# Altium PCB PCB1.PcbDoc
Units mm, origin at the board's own origin, x right, y up, seen from the top; angles counter-clockwise.
Board outline 15.62 x 20.45 mm, 2 copper layers (Top Layer, Bottom Layer); 13 components, 10 nets, 47 pads, 11 vias.
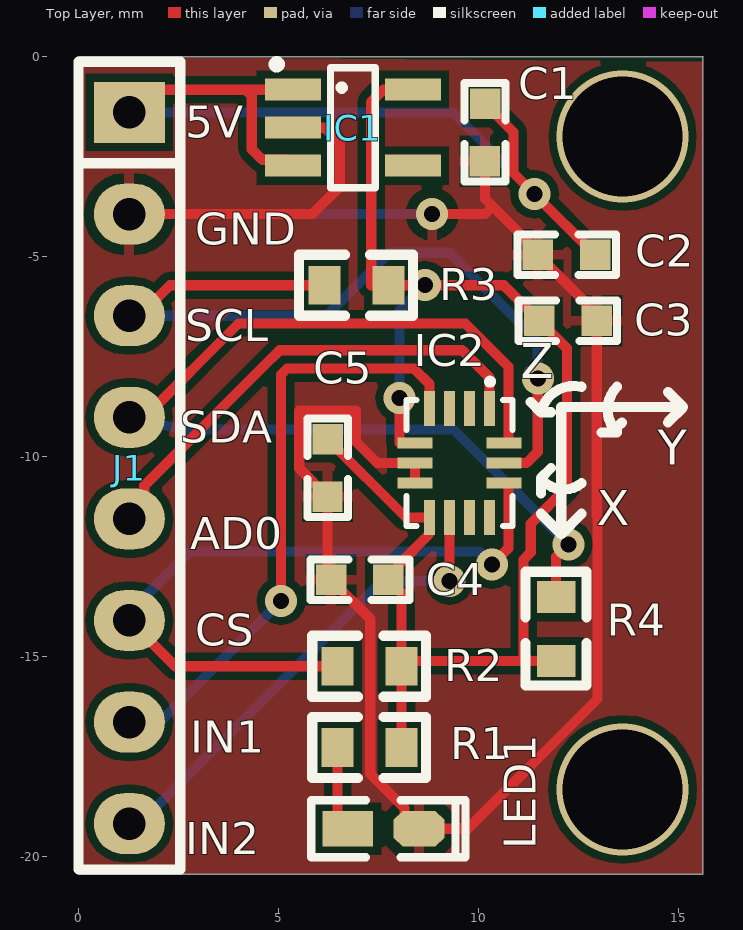
[diagram p0: Top Layer view]
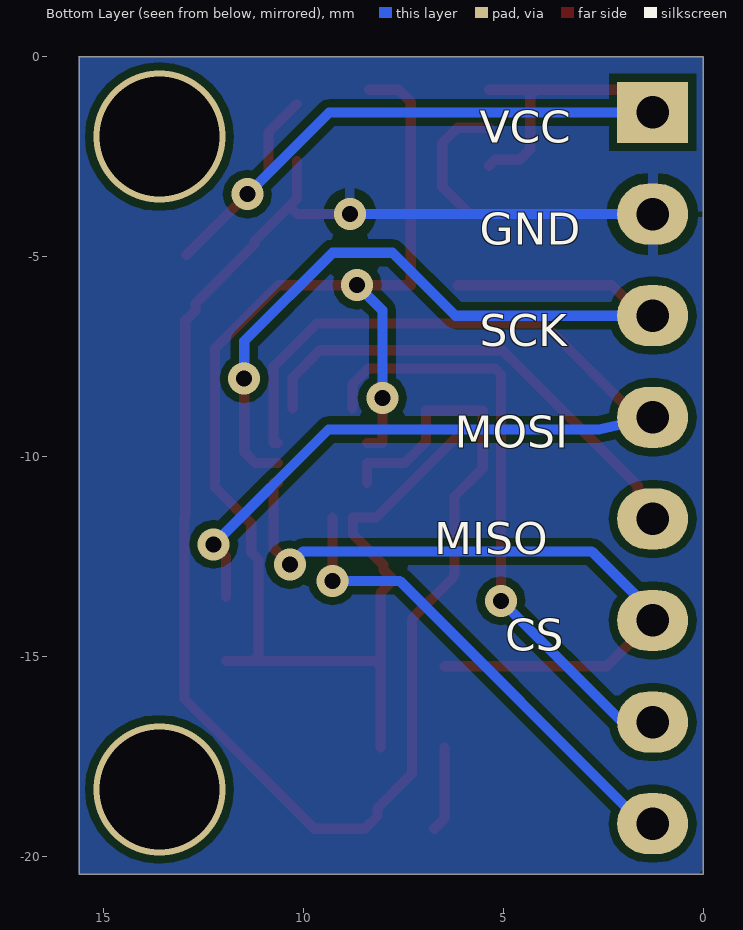
[diagram p1: Bottom Layer view, seen from below]
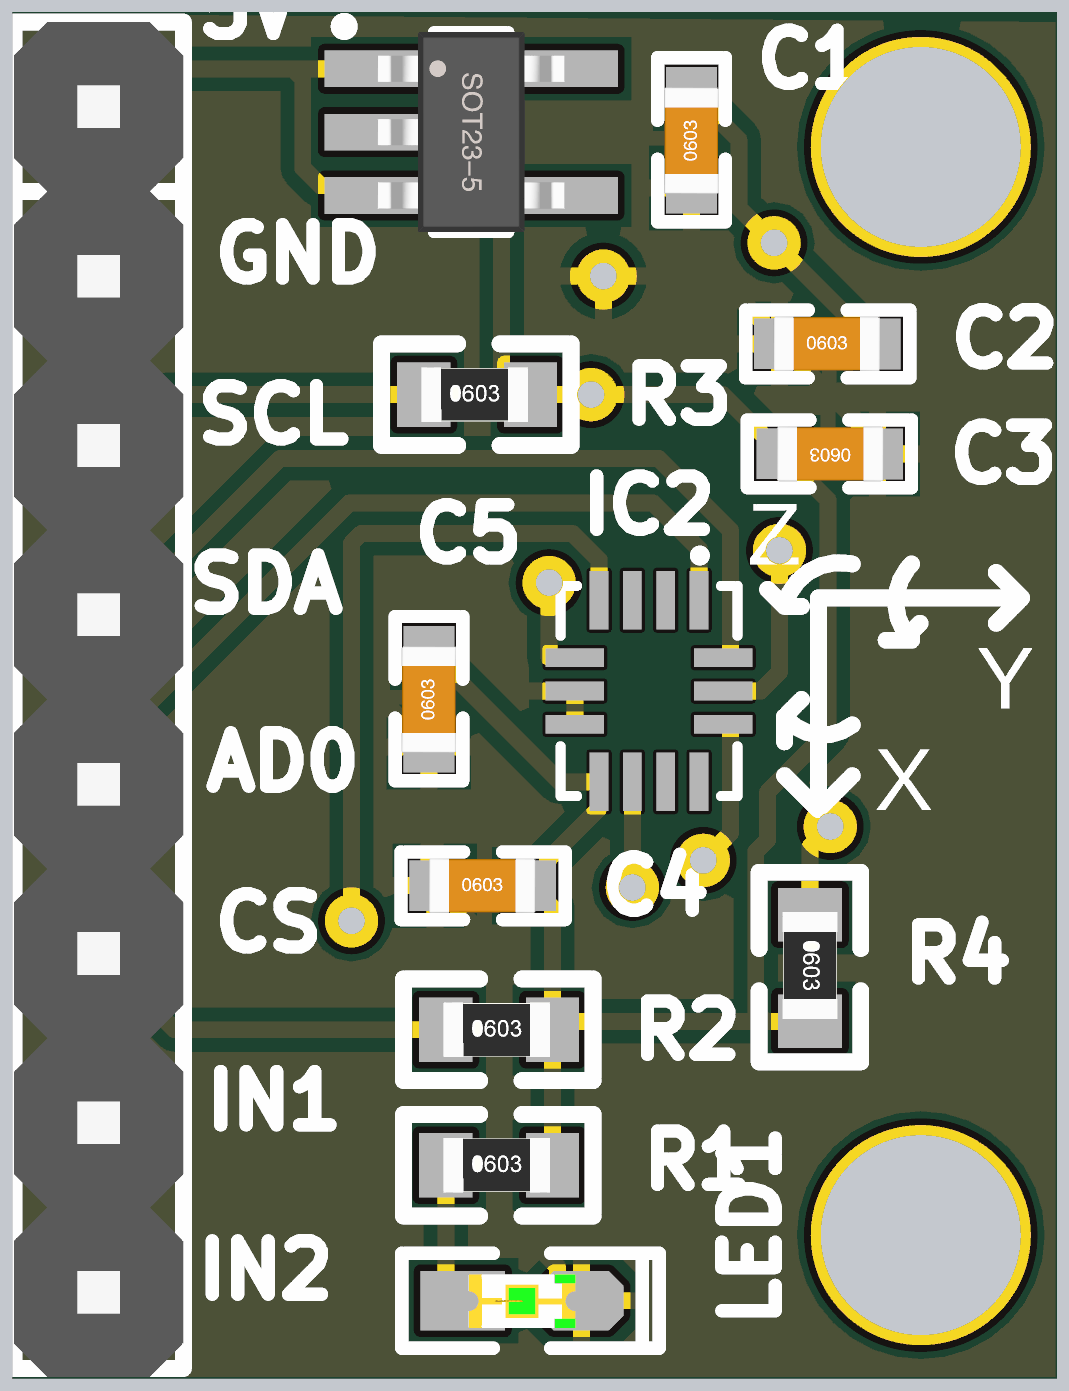
[diagram p2: 3D render of the assembled board from above, using the file's embedded part models]

## Layer stack, top to bottom
Top Solder: solder mask 0.0102, Solder Resist, Dk 3.5
Top Layer: signal copper 0.0356
Dielectric 1: dielectric 0.32, FR-4, Dk 4.8
Bottom Layer: signal copper 0.0356
Bottom Solder: solder mask 0.0102, Solder Resist, Dk 3.5

## Board outline
0,-20.447 15.6,-20.447 15.6,0 15.621,0 0,0

## Design rules (kind name [scope] priority, off if disabled: settings)
Clearance [All] p1: gap=0.2 ignorepadtopadclearanceinfootprint=TRUE except(0: Arc-Hole Track-Hole SMDPad-Hole THPad-Hole Via-Hole Fill-Hole Poly-Hole Region-Hole Text-Hole; 0.254: SMDPad-SMDPad)
PolygonConnect [All] p1: connectstyle=Relief reliefconductorwidth=0.254 reliefentries=4 polygonreliefangle="90 Angle" airgapwidth=0.254
RoutingVias [All] p1: holewidth=0.4 width=0.8 viastyle="Through Hole" minholewidth=0.4 minwidth=0.8 maxholewidth=0.711 maxwidth=1.27
SolderMaskExpansion [All] p1: expansion=0.102 istentingtop=FALSE
Width [All] p1: maxlimit=0.254 minlimit=0.254 preferedwidth=0.254
30 further rules are at their usual default settings.

## Components (designator, comment, footprint, x,y, rotation, side; value= is the part's Value field where it differs from the comment)
C1 "10UF" "C 0603" 10.16,-1.905 r90 top
C2 "104" "C 0603" 12.192,-4.953 r0 top
C3 "10UF" "C 0603" 12.243,-6.604 r180 top
C4 "104" "C 0603" 7.023,-13.079 r0 top
C5 "10nf" "C 0603" 6.223,-10.287 r90 top
IC1 "XC6204B332MR" SOT23-5M 6.858,-1.778 r270 top
IC2 "ICM-42688-P" LGA-14_L3.0-W2.5-P0.50-TL 9.525,-10.16 r270 top
J1 "Female HDR1X8" "Pin HDR1X8/2.54mm-S" 1.27,-1.397 r0 top
LED1 "BLUE" "LED 0603R" 7.62,-19.311 r0 top
R1 "1K" 0603R 6.477,-17.272 r0 top
R2 "10K" 0603R 6.477,-15.24 r0 top
R3 "10K" 0603R 6.147,-5.715 r0 top
R4 "10K" 0603R 11.938,-13.513 r270 top

## Footprints (in the part's own frame and the unit in brackets; to place one, negate y for a bottom-side part, rotate by r counter-clockwise, add the part's x,y. Pads: shape width x height; smd on the part's side, far side on the other; paste and mask are expansions set on the pad)
0603R [mm]
  rect 0.8x0.965 smd: 1(0,0) 2(1.6,0)
  silkscreen extent -0.64,-0.76 2.21,0.76, body extent -0.04,-0.41 1.56,0.41, height 0.45
"C 0603" [mil]
  rect 30x30 smd: 1(-28,0) 2(28.5,-0.06)
  silkscreen extent -48,-20 49,20, body extent -31,-16 31,16, height 32
"LED 0603R" [mil] "红色0603LED"
  rect 50x35 smd: 1(-35,0.26)
  oct 50x35 smd: 2(35,0.26)
  silkscreen extent -71,-28 81,28, body extent -31,-16 31,16, height 18
LGA-14_L3.0-W2.5-P0.50-TL [mm]
  rect 0.875x0.28 smd paste+0 mask+0.051: 1(-1.362,0.75) 2(-1.362,0.25) 3(-1.362,-0.25) 4(-1.362,-0.75) 8(1.362,-0.75) 9(1.362,-0.25) 10(1.362,0.25) 11(1.362,0.75)
  rect 0.28x0.875 smd paste+0 mask+0.051: 5(-0.5,-1.112) 6(0,-1.112) 7(0.5,-1.112) 12(0.5,1.112) 13(0,1.112) 14(-0.5,1.112)
  silkscreen extent -2.11,-1.33 1.58,1.33
"Pin HDR1X8/2.54mm-S" [mil]
  rect 70x60 hole 32: 1(0,0)
  oval 70x60 hole 32: 2(0,-100) 3(0,-200) 4(0,-300) 5(0,-400) 6(0,-500) 7(0,-600) 8(0,-700)
  silkscreen extent -50,-745 50,50, body extent -50,-750 50,50, height 336
SOT23-5M [mm] "3x1.6x1.1mm(长宽高)"
  rect 0.55x1.4 smd: 1(-0.95,-1.5) 2(0,-1.5) 3(0.95,-1.5) 4(0.95,1.5) 5(-0.95,1.5)
  silkscreen extent -1.66,-1.98 1.5,0.56, body extent -1.5,-1.4 1.5,1.4, height 1.15

## Part data
C1 C2 C3 C4 C5: library part C, "无极性贴片电容", BOM名称=无极性贴片电容, 版权归属=源创客, 学习资源=www.ooocke.com
IC1: library part "LDO XC6204", "LDO", BOM名称=稳压芯片, 版权归属=源创客, 学习资源=www.ooocke.com
IC2: BOM_JLCPCB Part Class="Extended Part", BOM_Manufacturer=InvenSense, BOM_Manufacturer Part=ICM-42688-P, BOM_Supplier=LCSC, BOM_Supplier Part=C1850418, Contributor=LCSC, spicePre=R, spiceSymbolName=ICM-42688-P
LED1: library part LED-SMD, "贴片LED", BOM名称=贴片LED, 版权归属=源创客, 学习资源=www.ooocke.com
R1 R2 R3 R4: library part R, "贴片电阻", BOM名称=贴片电阻, 版权归属=源创客, 学习资源=www.ooocke.com

## Via types
v1: diameter 0.8, hole 0.4, Top Layer to Bottom Layer, 9 vias
v2: diameter 3.3, hole 3, Top Layer to Bottom Layer, 2 vias

## Nets (pads, with @x,y where several pads share a name; then routed paths per layer and width w, separated by ;. In a path a pad name is that pad's centre, name@x,y a point inside that pad or via, vN(x,y) a via of type N, cw(c..) or ccw(c..) an arc to the next point about the centre after c; other vN are vias at no path point)
+3.3V: C3.2 C4.2 C5.2 IC1.5 IC2.5 IC2.8 R1.2 R2.2 R3.2 R4.2 | length 37.8
  Top Layer w0.254: C5.2 8.184,-11.522 IC2.8 8.762,-11.535 8.762,-11.939 8.001,-12.7 8.001,-12.827 C4.2 8.077,-13.411 R2.2 ; v1(8.026,-8.534) 8.026,-9.66 IC2.5 ; R1.2 R2.2 ; IC1.5 7.62,-0.828 7.315,-1.133 7.315,-5.715 R3.2 v1(8.654,-5.715) 10.632,-5.715 C3.2 12.208,-7.291 12.208,-10.773 11.303,-11.678 11.303,-12.395 11.125,-12.573 11.125,-14.964 11.274,-15.113 ; R4.2 11.274,-15.113 ; R2.2 8.204,-15.113 11.274,-15.113
  Bottom Layer w0.254: v1(8.026,-8.534) 8.026,-6.343 v1(8.654,-5.715)
CS: IC2.12 J1.6 R2.1 | length 18
  Top Layer w0.254: J1.6 2.413,-15.24 R2.1 ; v1(10.338,-12.7) 10.744,-12.294 10.744,-10.66 IC2.12
  Bottom Layer w0.254: J1.6 1.27,-13.894 2.794,-12.37 10.008,-12.37 v1(10.338,-12.7)
GND: C1.1 C2.1 C3.1 C4.1 C5.1 IC1.2 IC2.6 IC2.7 J1.2 LED1.2 | length 53.6
  Top Layer w0.254: J1.2 5.842,-3.937 6.528,-3.251 6.528,-2.159 6.147,-1.778 IC1.2 ; IC2.7 IC2.6 7.464,-10.16 6.934,-9.631 6.934,-8.855 5.517,-8.855 5.517,-10.292 C5.1 6.223,-12.886 ccw(c6.477,-12.886) C4.1 7.29,-14.057 7.29,-17.932 8.149,-18.791 8.149,-18.987 8.466,-19.304 9.728,-19.304 12.973,-16.059 12.973,-11.485 12.954,-11.467 C3.1 12.7,-6.35 12.7,-6.172 12.532,-6.005 11.227,-4.699 11.227,-4.623 10.351,-3.746 ; v1(8.839,-3.937) 10.16,-3.937 10.351,-3.746 ; C1.1 10.16,-3.556 10.351,-3.746
  Bottom Layer w0.254: J1.2 v1(8.839,-3.937)
INT1: IC2.4 J1.7 | length 15.3
  Top Layer w0.254: v1(5.063,-13.606) 5.063,-7.946 5.211,-7.797 8.382,-7.797 8.775,-8.19 IC2.4
  Bottom Layer w0.254: J1.7 2.032,-16.637 v1(5.063,-13.606)
INT2: IC2.9 J1.8 | length 12.1
  Top Layer w0.254: v1(9.275,-13.106) IC2.9
  Bottom Layer w0.254: J1.8 1.524,-19.177 7.595,-13.106 v1(9.275,-13.106)
MISO/AD0: IC2.1 J1.5 | length 12.1
  Top Layer w0.254: J1.5 1.64,-11.187 1.64,-10.727 4.597,-7.769 5.026,-7.341 9.589,-7.341 10.275,-8.026 IC2.1
MOSI/SDA: IC2.14 J1.4 R4.1 | length 26.6
  Top Layer w0.254: J1.4 1.651,-9.017 3.997,-6.671 9.669,-6.671 10.744,-7.747 10.744,-9.66 IC2.14 ; R4.1 11.938,-12.497 v1(12.243,-12.192)
  Bottom Layer w0.254: J1.4 2.616,-9.322 9.373,-9.322 v1(12.243,-12.192)
NetLED1_1: LED1.1 R1.1 | length 2.1
  Top Layer w0.254: R1.1 6.477,-19.05 LED1.1
SCK/SCL: IC2.13 J1.3 R3.1 | length 20.7
  Top Layer w0.254: J1.3 1.524,-6.477 2.286,-5.715 R3.1 ; IC2.13 11.201,-10.16 11.481,-9.881 v1(11.481,-8.052)
  Bottom Layer w0.254: J1.3 6.197,-6.477 7.772,-4.902 9.271,-4.902 11.481,-7.112 v1(11.481,-8.052)
VCC: C1.2 C2.2 IC1.1 IC1.3 J1.1 | length 23
  Top Layer w0.254: J1.1 1.839,-0.828 4.182,-0.828 ; IC1.3 5.21,-2.58 4.594,-2.58 4.331,-2.317 4.331,-0.977 4.182,-0.828 ; IC1.1 4.182,-0.828 ; C1.2 10.871,-1.891 10.871,-2.91 v1(11.4,-3.439) C2.2
  Bottom Layer w0.254: J1.1 9.358,-1.397 v1(11.4,-3.439)
pads on no net: IC1.4 IC2.2 IC2.3 IC2.10 IC2.11
copper on no net:
  other v2: 13.6,-18.32 13.6,-2

## Polygon pours and split planes (outlines as drawn)
GND on Top Layer "NONET_L-01_P-001" (solid, pour order 0): 15.621,-0.127 15.621,-20.447 0,-20.447 0,0
GND on Bottom Layer "NONET_L-01_P-001" (solid, pour order 1): 0,0 15.621,0 15.621,-20.447 0.127,-20.447 0,-20.32

## Silkscreen, mask and mechanical layers (free items; w line width, h text height)
Top Overlay:
  lines w0.254: 11.303,-8.636 11.557,-8.89 ; 11.557,-11.43 12.065,-11.938 ; 11.557,-10.922 11.557,-10.541 ; 11.811,-10.287 11.557,-10.541 ; 11.811,-8.89 11.557,-8.89 ; 12.573,-11.43 12.065,-11.938 ; 12.573,-10.668 cw(c12.128,-10.096) 11.557,-10.541 ; 12.573,-8.255 ccw(c12.383,-9.08) 11.557,-8.89 ; 13.081,-9.398 13.462,-9.398 ; 13.462,-8.255 ccw(c14.034,-8.826) 13.462,-9.398 ; 13.589,-9.144 13.462,-9.271 13.462,-9.398 ; 14.732,-9.144 15.113,-8.763 ; 14.732,-8.382 15.113,-8.763 ; 12.065,-11.938 12.065,-8.763 15.113,-8.763
  text "5V" at 2.667,-2.032 h0.8
  text "GND" at 2.921,-4.699 h0.8
  text "SCL" at 2.667,-7.112 h0.8
  text "Z" at 11.049,-8.326 h1.5
  text "SDA" at 2.54,-9.652 h0.8
  text "Y" at 14.478,-10.489 h1.5
  text "X" at 12.954,-12.009 h1.5
  text "AD0" at 2.794,-12.319 h0.8
  text "CS" at 2.921,-14.732 h0.8
  text "IN1" at 2.794,-17.399 h0.8
  text "IN2" at 2.667,-19.939 h0.8
Bottom Overlay:
  text "VCC" at 5.588,-2.159 h0.8
  text "GND" at 5.588,-4.699 h0.8
  text "SCK" at 5.588,-7.239 h0.8
  text "MOSI" at 6.223,-9.779 h0.8
  text "MISO" at 6.731,-12.446 h0.8
  text "CS" at 4.953,-14.859 h0.8
Mechanical 1:
  lines w0.254: 0,-20.447 0,0 15.621,0 15.621,-20.447 0,-20.447